# EAGLE board 20161130-0004-gmt+2-attiny10-breakout-design-4-breakout-programmer (EAGLE 7.2.0)
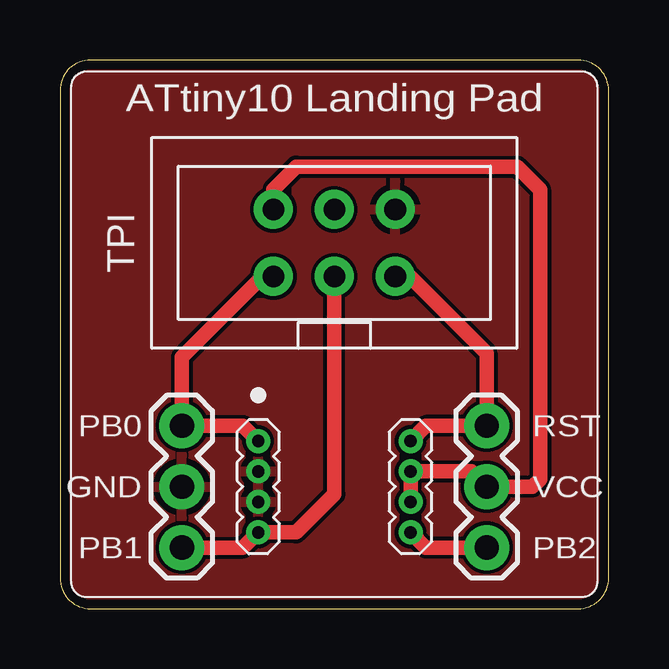
[diagram p0: board, top side]
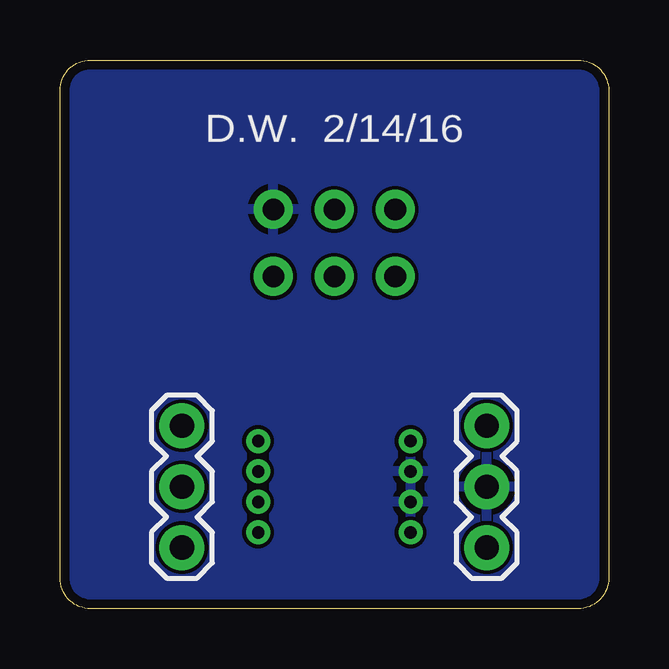
[diagram p1: board, bottom side, seen from below]

Size 22.86 x 22.86 mm. Coordinates in mm from the lower left corner, seen from the top.
Outline: 0,21.59 0,1.27 arc90 1.27,0 21.59,0 arc90 22.86,1.27 22.86,21.59 arc90 21.59,22.86 1.27,22.86 arc90 0,21.59
Copper layers (1*16): Top 0.0356mm / dielectric 1.5011mm / Bottom 0.0356mm
Design rules "oshpark-2layer": minimum track width 6mil, minimum drill 13mil, track to track 6mil, track to pad 6mil, pad to pad 6mil, via to via 6mil, smd to smd 6mil, copper to edge 15mil, drill to drill 6mil, minimum pad ring 7mil, minimum via ring 7mil, stop-mask expansion 4mil, vias tented up to drill 0mil, thermal gap 10mil

## Footprints (pad centres in the part's own frame; a part is rotated, then mirrored left to right if it is on the bottom)
1X04-1.27MM = drill 0.508 pad 1: 1 0,0; 2 1.27,0; 3 2.54,0; 4 3.81,0
1X03 = drill 1.016 pad 1.88: 1 0,0; 2 2.54,0; 3 5.08,0
AVRISP-BOX = drill 0.9 pad 1.626: 1 -1.397,2.54; 2 1.397,2.54; 3 -1.397,0; 4 1.397,0; 5 -1.397,-2.54; 6 1.397,-2.54

## Placement (x,y rotation side)
JP1  [1X04-1.27MM]  8.26,6.99 270 top
JP2  [1X04-1.27MM]  14.61,6.99 270 top
JP3  [1X03]  5.08,7.62 270 top
JP4  [1X03]  17.78,7.62 270 top
TPI_PRG_HEADER  AVRISP-BOX  [AVRISP-BOX]  11.43,15.24 90 top

## Library data of the parts
JP1-JP4 = SparkFun-Connectors
TPI_PRG_HEADER = adafruit

## Nets
GND: JP1.2 JP1.3 JP3.2 TPI_PRG_HEADER.6
PB0: JP1.1 JP3.1 TPI_PRG_HEADER.1
PB1: JP1.4 JP3.3 TPI_PRG_HEADER.3
PB2: JP2.4 JP4.3
RST: JP2.1 JP4.1 TPI_PRG_HEADER.5
VCC: JP2.2 JP2.3 JP4.2 TPI_PRG_HEADER.2

## Tracks (layer width: path | path; a pad name or v marks a point on that pad's centre or on a via)
GND
  pour Bottom: -2.54,25.4 -3.81,25.4 -3.81,-3.81 27.94,-3.81 27.94,25.4
  pour Top: -1.27,22.86 -1.27,-2.54 25.4,-2.54 25.4,22.86 25.4,24.13 -1.27,24.13
PB0
  Top 0.61: JP1.1 7.62,7.62 JP3.1 5.08,10.48 8.45,13.84 TPI_PRG_HEADER.1
PB1
  Top 0.61: JP3.3 7.62,2.54 JP1.4 9.84,3.17 11.43,4.76 TPI_PRG_HEADER.3
PB2
  Top 0.61: JP4.3 15.24,2.54 JP2.4
RST
  Top 0.61: JP2.1 15.24,7.62 JP4.1 17.78,10.64 14.57,13.84 TPI_PRG_HEADER.5
VCC
  Top 0.61: JP2.3 JP2.2 17.14,5.71 JP4.2 19.68,5.08 20,5.4 20,17.46 19.05,18.41 9.84,18.41 8.89,17.46 TPI_PRG_HEADER.2

## Text on the board
tNames: ATtiny10 Landing Pad | TPI | PB0 | RST | GND | VCC | PB1 | PB2
bNames: D.W. 2/14/16